# Altium PCB Sensor.PcbDoc
Units mm, origin at the board's own origin, x right, y up, seen from the top; angles counter-clockwise.
Board outline 55 x 30.2 mm, 4 copper layers (Top Layer, Layer 1, Layer 2, Bottom Layer), stack 0.603 mm thick; 56 components, 41 nets, 322 pads, 96 vias.
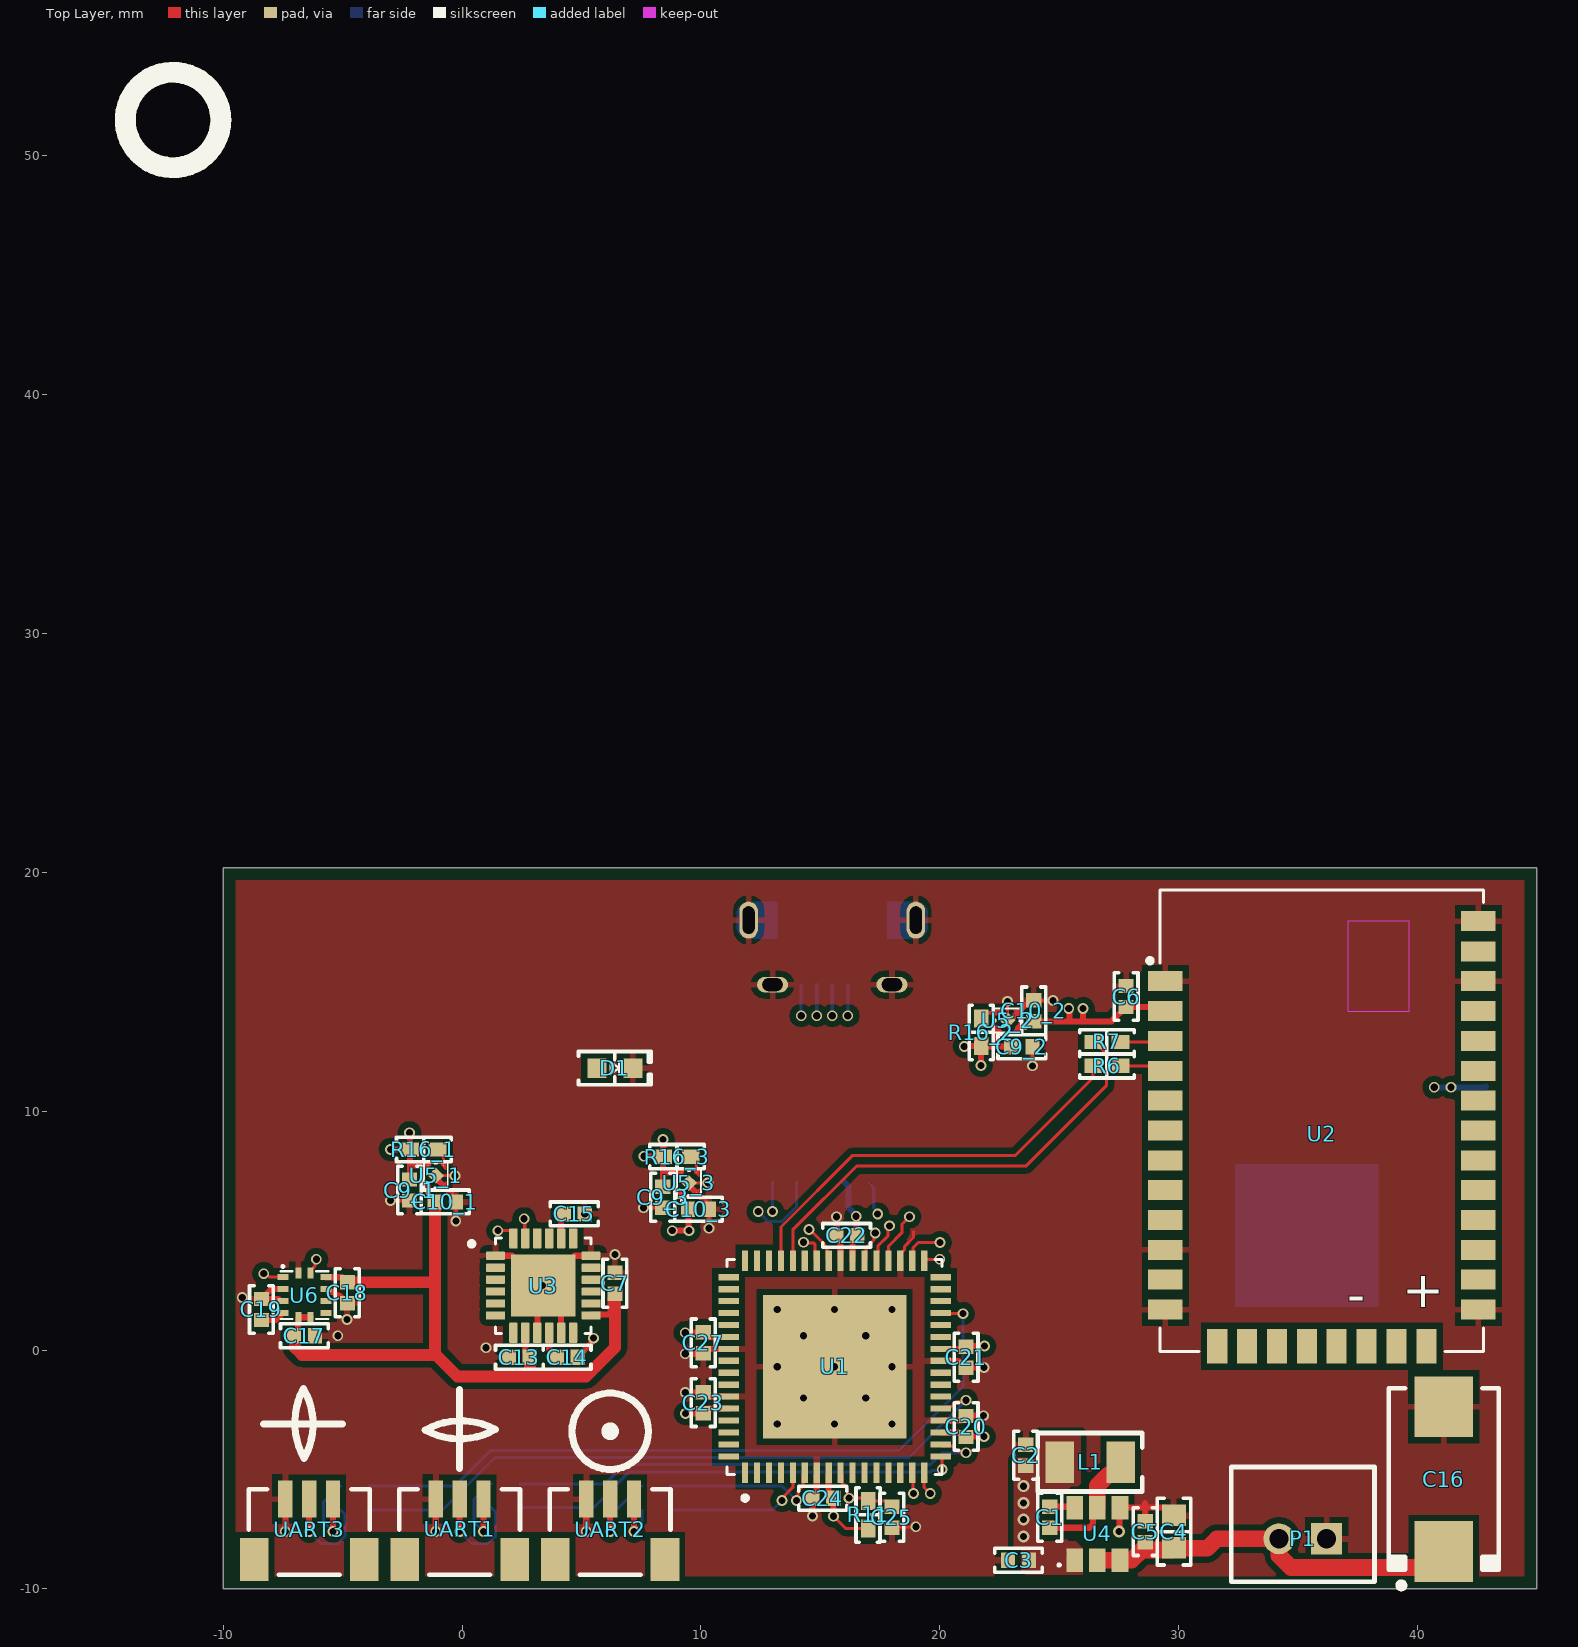
[diagram p0: Top Layer view]
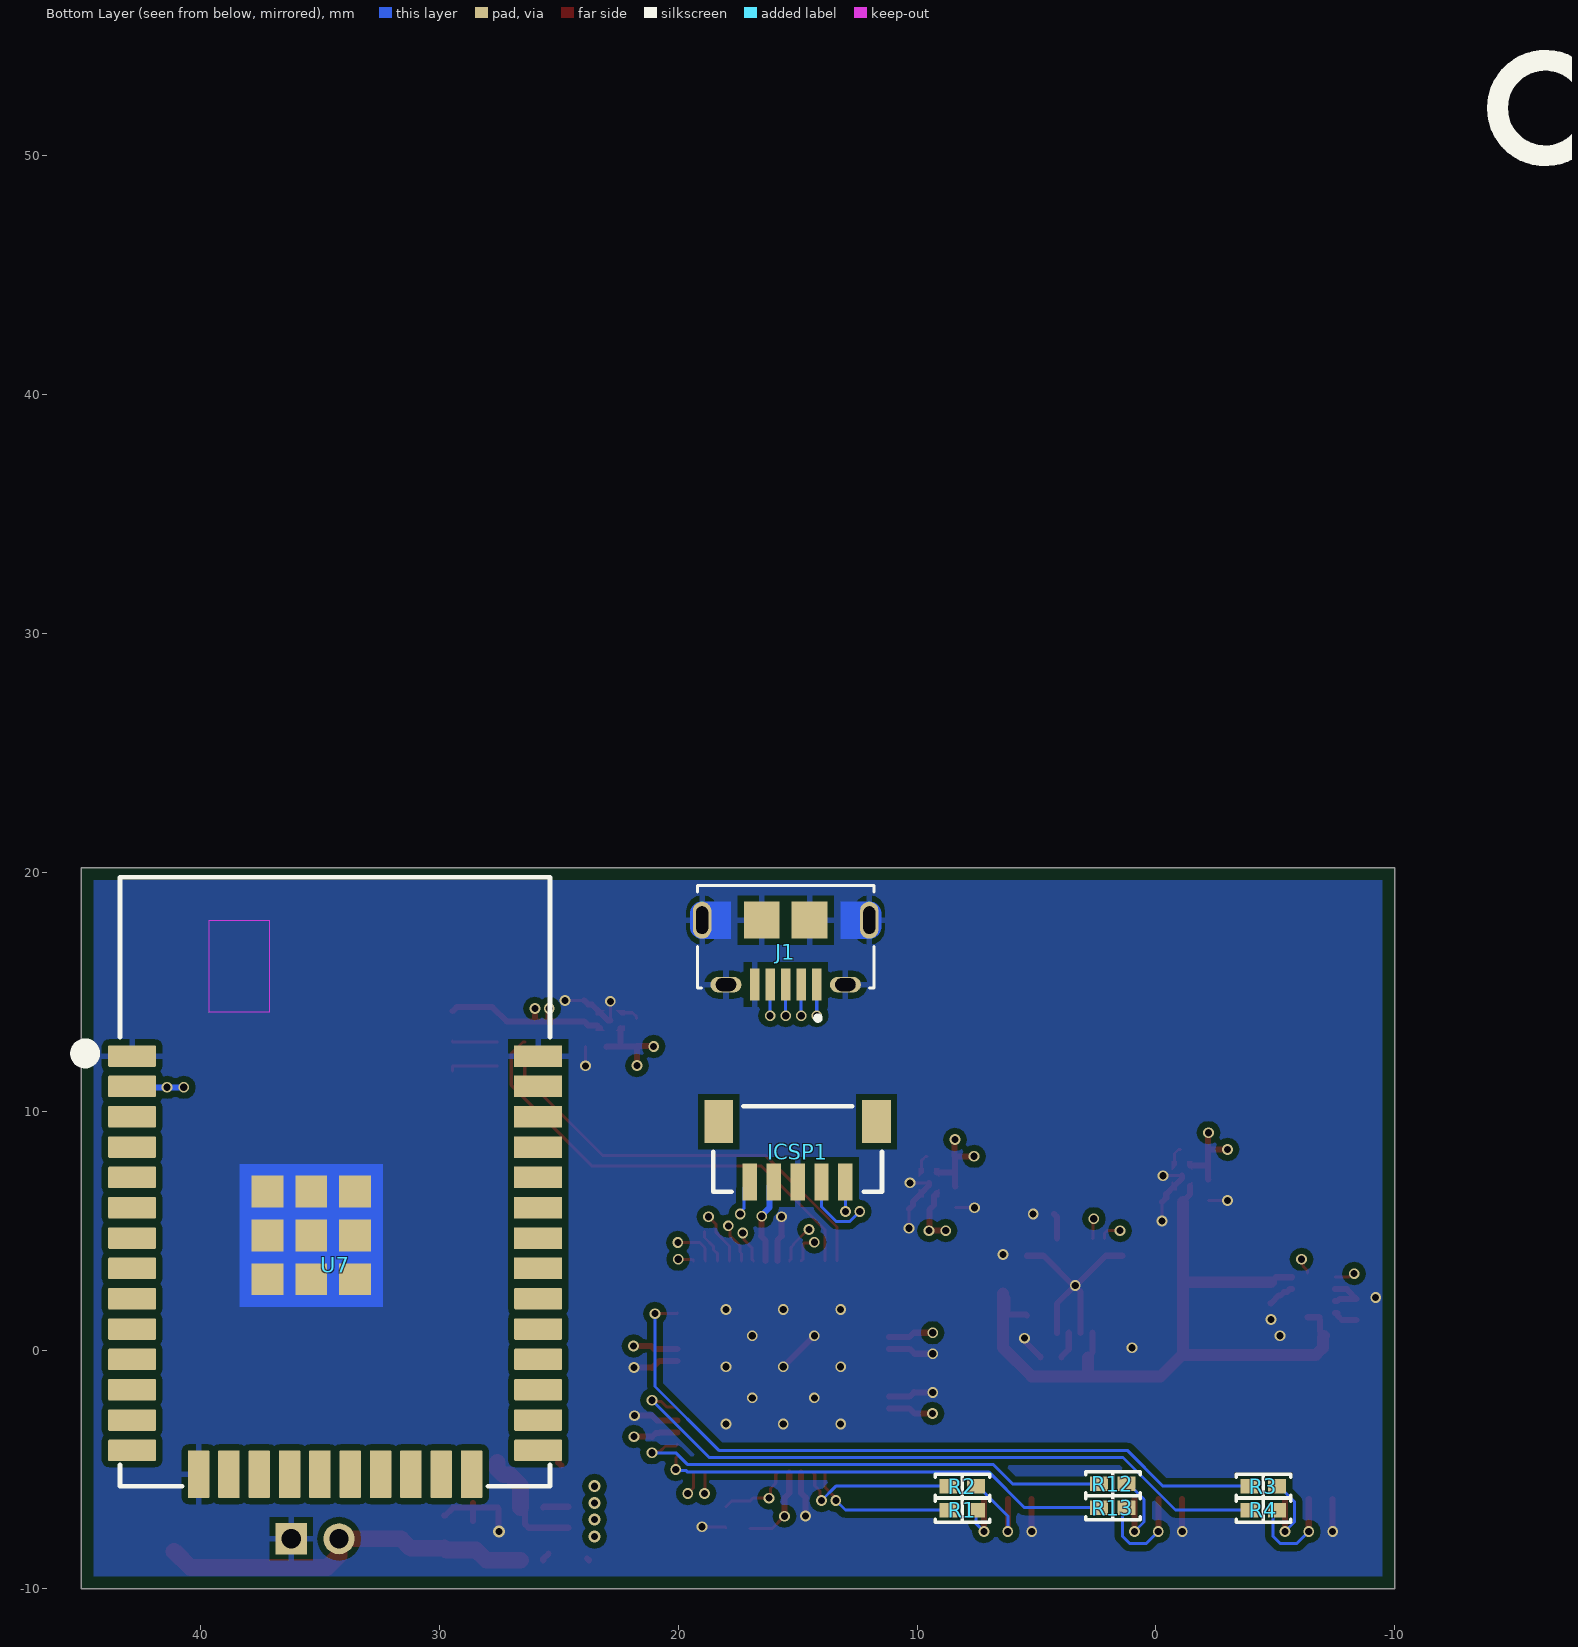
[diagram p1: Bottom Layer view, seen from below]
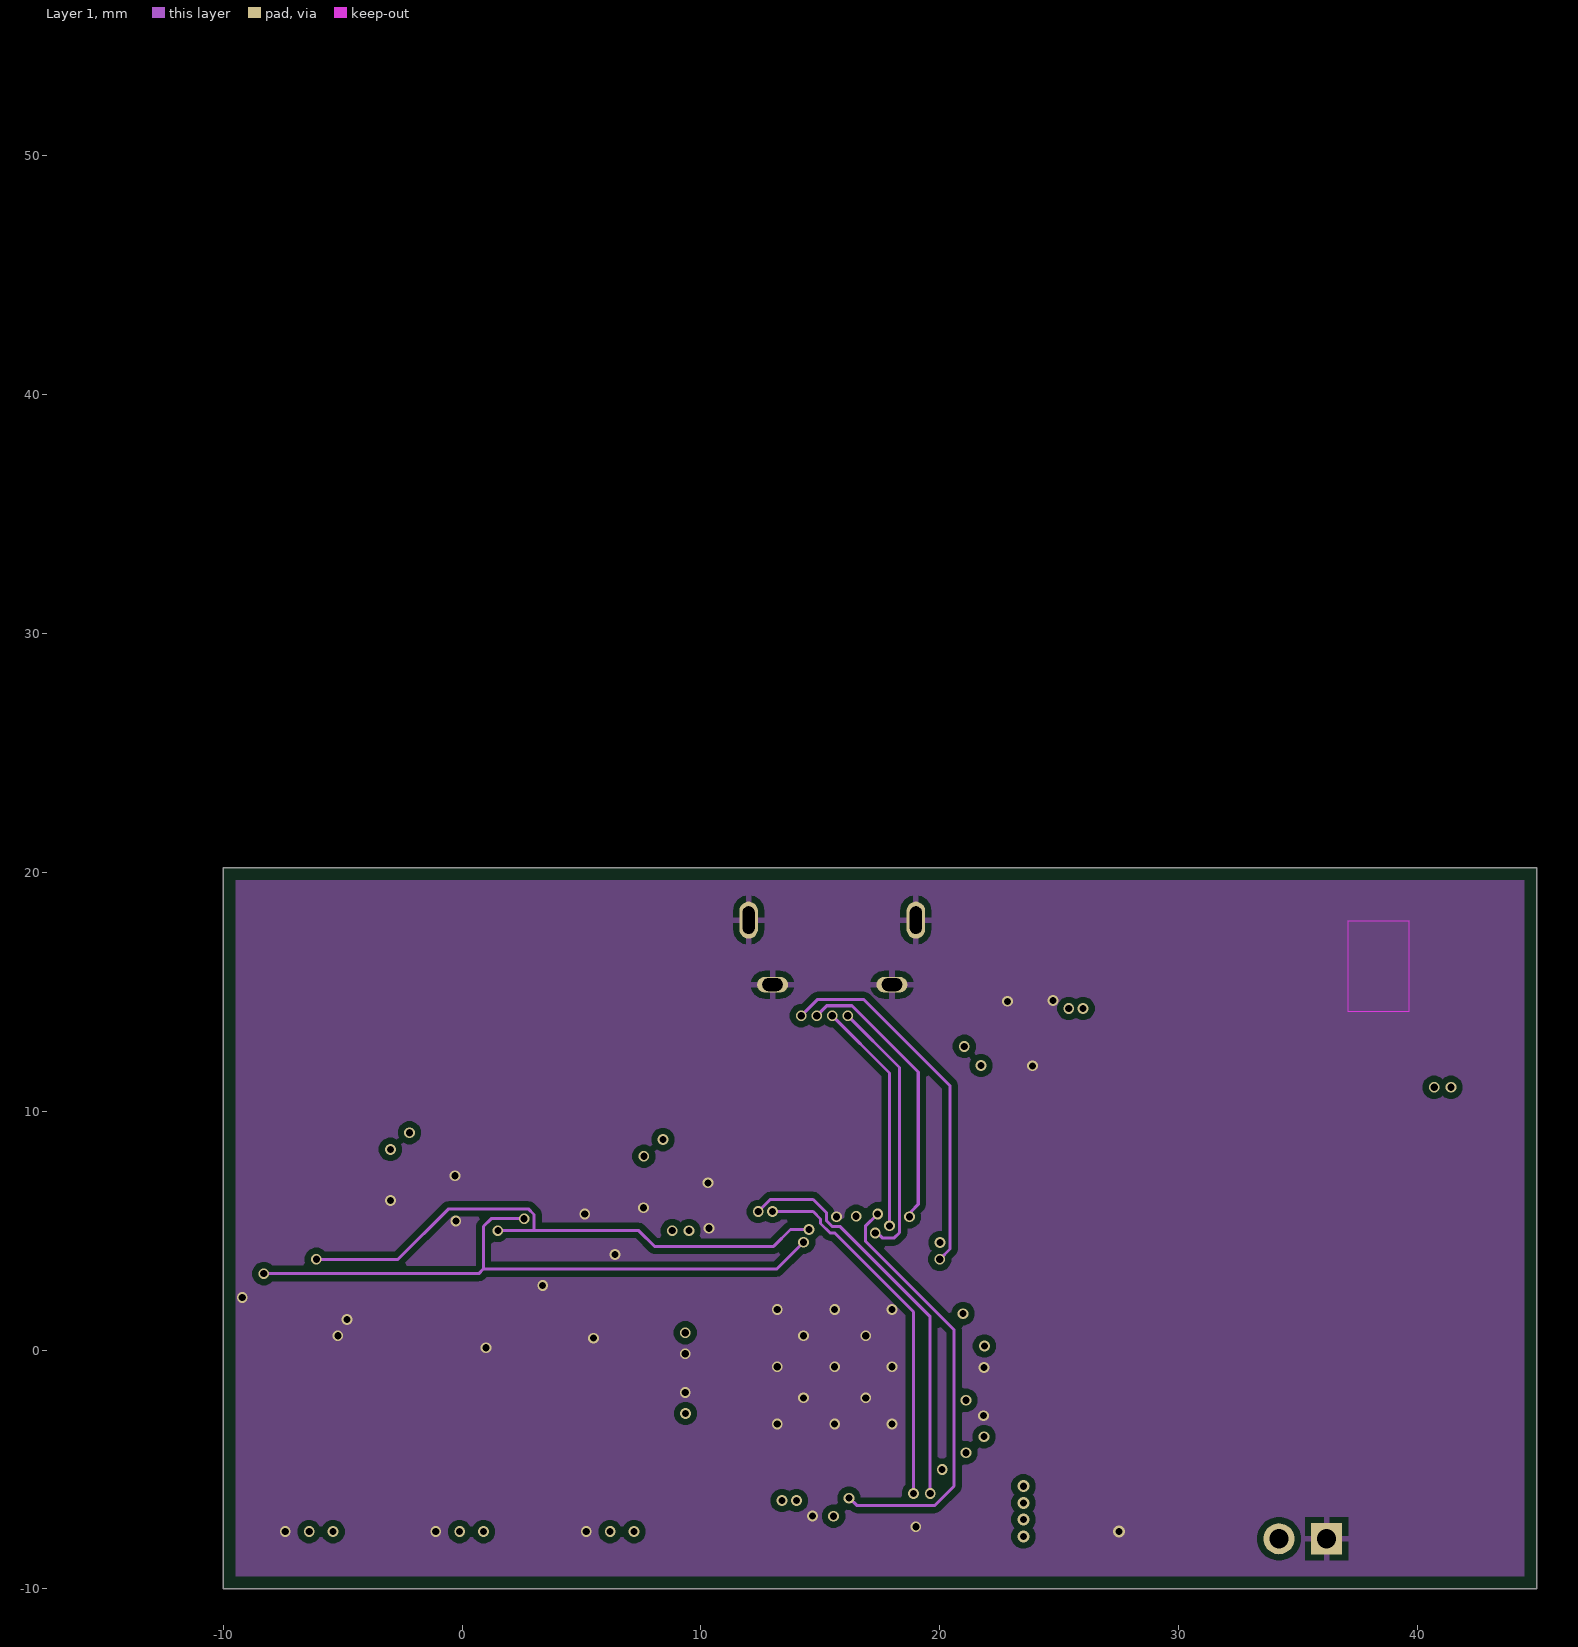
[diagram p2: Layer 1]
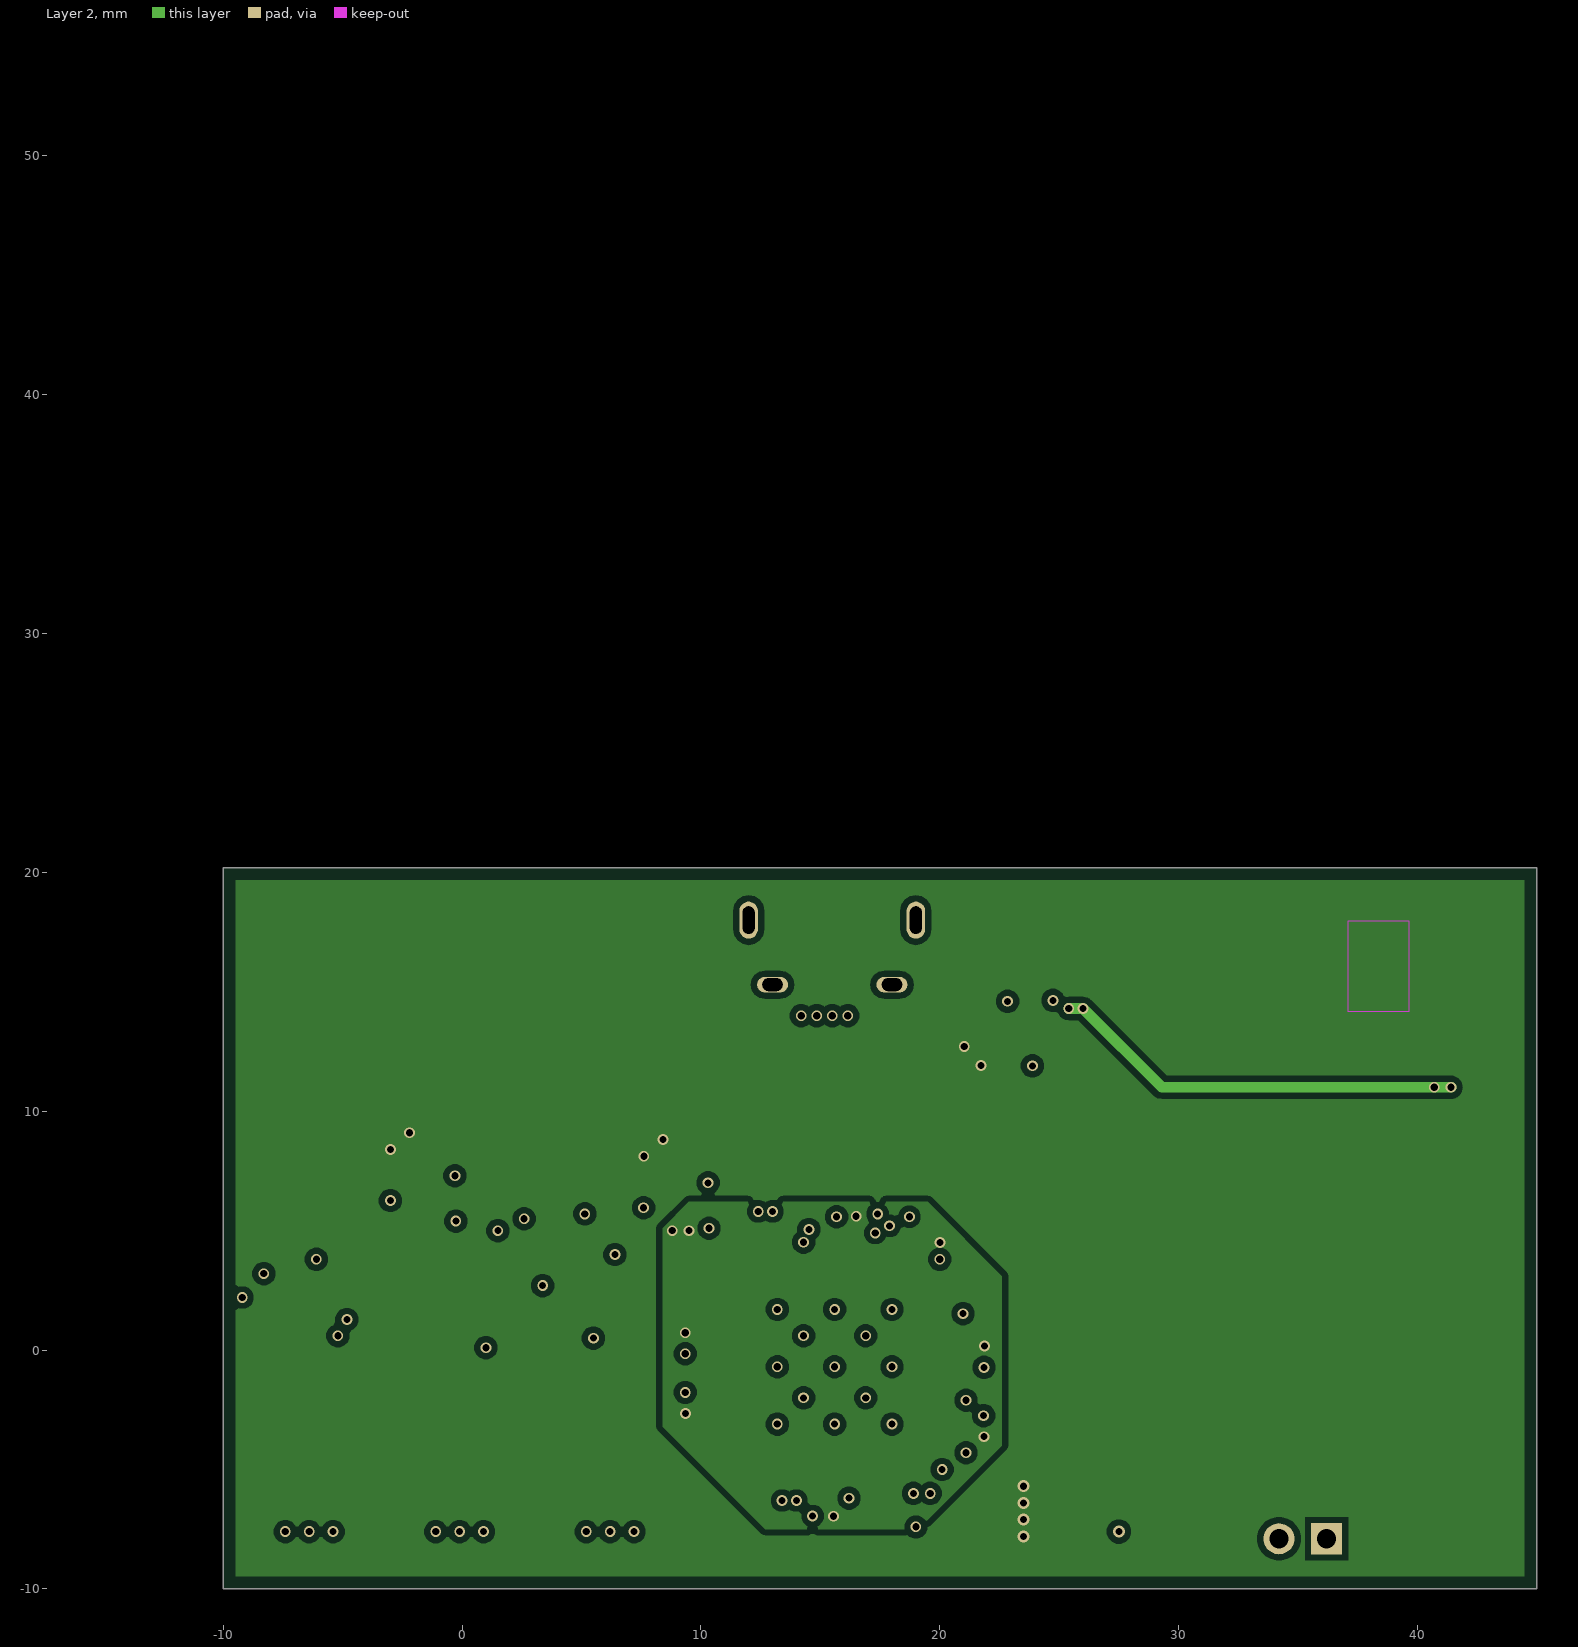
[diagram p3: Layer 2]

## Layer stack, top to bottom
Top Solder: solder mask 0.0102, Solder Resist, Dk 3.5
Top Layer: signal copper 0.0356
Dielectric 2: prepreg 0.0711, PP-006, Dk 4.1
Layer 1: signal copper 0.035
Dielectric 1: dielectric 0.32, FR-4, Dk 4.8
Layer 2: signal copper 0.035
Dielectric 3: prepreg 0.0711, PP-006, Dk 4.1
Bottom Layer: signal copper 0.0356
Bottom Solder: solder mask 0.0102, Solder Resist, Dk 3.5

## Board outline
-10,-10 -10,20.2 45,20.2 45,-10

## Design rules (kind name [scope] priority, off if disabled: settings)
BoardOutlineClearance [All] p1: gap=0.512 ignorepadtopadclearanceinfootprint=FALSE
Clearance "PolyGon Pour Clearance" [InPolygon] p1: gap=0.254 ignorepadtopadclearanceinfootprint=FALSE except(0: Arc-Hole Track-Hole SMDPad-Hole THPad-Hole Via-Hole Fill-Hole Poly-Hole Region-Hole Text-Hole; 0.512: Arc-Text Track-Text SMDPad-Text THPad-Text Via-Text Fill-Text Poly-Text Region-Text Text-Text)
Clearance [All] p2: gap=0.127 ignorepadtopadclearanceinfootprint=TRUE
HoleSize [All] p1: absolutevalues=TRUE maxlimit=10 minlimit=0.025 maxpercent=80.000 minpercent=20.000
PolygonConnect PolygonRelief [IsPolygon and not (IsNamedPolygon('PolygonDirect'))] p1: thpad.connectstyle=Relief thpad.reliefconductorwidth=0.254 thpad.reliefentries=4 thpad.polygonreliefangle="90 Angle" thpad.airgapwidth=0.254 smdpad.connectstyle=Relief smdpad.reliefconductorwidth=0.254 smdpad.reliefentries=4 smdpad.polygonreliefangle="90 Angle" smdpad.airgapwidth=0.254 via.connectstyle=Direct via.reliefconductorwidth=0.254 via.reliefentries=4 via.polygonreliefangle="90 Angle" via.airgapwidth=0.254
PolygonConnect PolygonDirect [All] p2: connectstyle=Direct reliefconductorwidth=0.254 reliefentries=4 polygonreliefangle="90 Angle" airgapwidth=0.254
RoutingVias [All] p1: holewidth=0.3 width=0.5 viastyle="Through Hole" minholewidth=0.3 minwidth=0.45 maxholewidth=0.7 maxwidth=1.27
SolderMaskExpansion [All] p1: expansion=0.102 istentingtop=FALSE
SupplyNets "Schematic Supply Nets_5" [InNet('3V3_IMU')] p1: voltage=0.000
SupplyNets "Schematic Supply Nets_4" [InNet('3V3')] p2: voltage=0.000
SupplyNets "Schematic Supply Nets_3" [InNet('GND')] p3: voltage=0.000
SupplyNets "Schematic Supply Nets_2" [InNet('3V3_XBee')] p4: voltage=0.000
SupplyNets "Schematic Supply Nets_1" [InNet('5V')] p5: voltage=0.000
SupplyNets "Schematic Supply Nets" [InNet('VBAT')] p6: voltage=0.000
Width [All] p1: maxlimit=0.712 minlimit=0.127 preferedwidth=0.254
29 further rules are at their usual default settings.

## Classes and differential pairs
channel class 3V3_LDO: U_3V3_LDO2

## Components (designator, comment, footprint, x,y, rotation, side; value= is the part's Value field where it differs from the comment)
C1 "1 µF" "CAP 0402_1005" 24.6,-7 r270 top
C2 "1 µF" "CAP 0402_1005" 23.6,-4.4 r270 top
C3 "22 µF" "CAP 0402_1005" 23.3,-8.8 r0 top
C4 "22 µF" "CAP 0603_1608" 29.8,-7.6 r270 top
C5 "0.1 µF" "CAP 0402_1005" 28.6,-7.6 r270 top
C6 "1 µF" "CAP 0402_1005" 27.8,14.8 r90 top
C7 "0.1 µF" "CAP 0402_1005" 6.4,2.8 r90 top
C9_1 "0.1 µF" "CAP 0402_1005" -2.2,6.7 r90 top (schematic designator C9)
C9_2 "0.1 µF" "CAP 0402_1005" 23.44,12.7 r180 top (schematic designator C9)
C9_3 "0.1 µF" "CAP 0402_1005" 8.4,6.4 r90 top (schematic designator C9)
C10_1 "0.1 µF" "CAP 0402_1005" -0.7,6.2 r180 top (schematic designator C10)
C10_2 "0.1 µF" "CAP 0402_1005" 23.94,14.2 r270 top (schematic designator C10)
C10_3 "0.1 µF" "CAP 0402_1005" 9.9,5.9 r180 top (schematic designator C10)
C13 "0.01 µF" "CAP 0402_1005" 2.4,-0.3 r180 top
C14 "0.1 µF" "CAP 0402_1005" 4.4,-0.3 r0 top
C15 "2200 pF" "CAP 0402_1005" 4.7,5.7 r0 top
C16 "100µF" "CAP POL 2917_7343" 41.1,-5.4 r90 top
C17 "1 µF" "CAP 0402_1005" -6.6,0.6 r0 top
C18 "0.1 µF" "CAP 0402_1005" -4.8,2.4 r270 top
C19 "0.1 µF" "CAP 0402_1005" -8.4,1.7 r90 top
C20 "0.1 µF" "CAP 0402_1005" 21.1,-3.2 r270 top
C21 "0.1 µF" "CAP 0402_1005" 21.1,-0.3 r90 top
C22 "0.1 µF" "CAP 0402_1005" 16.1,4.8 r0 top
C23 "0.1 µF" "CAP 0402_1005" 10.1,-2.2 r270 top
C24 "0.1 µF" "CAP 0402_1005" 15.1,-6.2 r0 top
C25 "0.1 µF" "CAP 0402_1005" 18,-7 r270 top
C27 "0.1 µF" "CAP 0402_1005" 10.1,0.3 r90 top
D1 "Green" "LED 0603_1608 GREEN" 6.4,11.8 r0 top
ICSP1 "BM05B-SRSS-TB(LF)(SN)" "JST BM05B-SRSS-TB" 15,8.3 r180 bottom
J1 "Mirco USB port" AMPHENOL_10118194-0001LF 15.5,18 r0 bottom
L1 "4.7µH" "IND 1008_2520" 26.3,-4.7 r180 top
P1 "2 pin 2mm JST Male" "2pin - 2mm JST male" 35.2,-7.9 r180 top
R1 "22 Ohms" "RES 0402_1005" 8.1,-6.7 r180 bottom
R2 "22 Ohms" "RES 0402_1005" 8.1,-5.7 r180 bottom
R3 "22 Ohms" "RES 0402_1005" -4.5,-5.7 r180 bottom
R4 "22 Ohms" "RES 0402_1005" -4.5,-6.7 r180 bottom
R6 "22 Ohms" "RES 0402_1005" 27,11.9 r0 top
R7 "22 Ohms" "RES 0402_1005" 27,12.9 r0 top
R11 "10k" "RES 0402_1005" 17,-6.9 r90 top
R12 "22 Ohms" "RES 0402_1005" 1.8,-5.6 r180 bottom
R13 "22 Ohms" "RES 0402_1005" 1.8,-6.6 r180 bottom
R16_1 "10k" "RES 0402_1005" -1.6,8.4 r0 top (schematic designator R16)
R16_2 "10k" "RES 0402_1005" 21.74,13.3 r90 top (schematic designator R16)
R16_3 "10k" "RES 0402_1005" 9,8.1 r0 top (schematic designator R16)
U1 "PIC32MZ0512EFE064" QFN50P900X900X100-65N 15.6,-0.7 r90 top
U2 "XB3-24Z8UM-J" XCVR_XB3-24Z8UM-J 36,9.6 r0 top
U3 "MPU6050" IC_MPU6050 3.4,2.7 r0 top
U4 "AP63205WU-7" "TSOT-26-6 - 3.2mm" 26.6,-7.7 r180 top
U5_1 "3.3V LDO" XDFN-4 -1.1,7.3 r90 top (schematic designator U5)
U5_2 "3.3V LDO" XDFN-4 22.84,13.8 r180 top (schematic designator U5)
U5_3 "3.3V LDO" XDFN-4 9.5,7 r90 top (schematic designator U5)
U6 "LIS3MDL" LGA12_ST -6.6,2.3 r0 top
U7 "ESP32" "Espressif ESP32-WROOM-32" 34.365,4.8 r180 bottom
UART1 "BM03B-SRSS-TB(LF)(SN)" "JST BM03B-SRSS-TB" -0.1,-7.5 r180 top
UART2 "BM03B-SRSS-TB(LF)(SN)" "JST BM03B-SRSS-TB" 6.2,-7.5 r180 top
UART3 "BM03B-SRSS-TB(LF)(SN)" "JST BM03B-SRSS-TB" -6.4,-7.5 r180 top

## Footprints (in the part's own frame and the unit in brackets; to place one, negate y for a bottom-side part, rotate by r counter-clockwise, add the part's x,y. Pads: shape width x height; smd on the part's side, far side on the other; paste and mask are expansions set on the pad)
"2pin - 2mm JST male" [mm]
  rect 1.3x1.3 hole 0.8: 1(-1,0)
  round 1.3 hole 0.8: 2(1,0)
  silkscreen extent -3,-3 3,1.8, body extent -2.93,-2.97 2.93,1.7, height 5.89
AMPHENOL_10118194-0001LF [mm]
  rect 0.4x1.35 smd: 1(-1.3,2.7) 2(-0.65,2.7) 3(0,2.7) 4(0.65,2.7) 5(1.3,2.7)
  oval 1.3x0.65 hole 0.55 slot 0.85 at 0 deg: S1(-2.5,2.7) S2(2.5,2.7)
  oval 0.775x1.55 hole 0.5 slot 1.15 at 90 deg: S3(-3.5,0) S6(3.5,0)
  rect 1.5x1.55 smd: S4(-1,0) S5(1,0)
  Top Layer region: 193 vertices and 0 holes, not listed, extent -4,-0.775 -2.3,0.78
  Top Layer region: 193 vertices and 0 holes, not listed, extent 2.3,-0.78 4,0.775
  silkscreen extent -3.7,-1.45 3.7,4.2, body extent -4.02,-2.7 4.03,3.1, height 2.7
"CAP 0402_1005" [mm] "Chip Capacitor, 2-Leads, Body 1.02x0.51mm, IPC Medium Density"
  rect 0.6x0.64 smd: 1(-0.44,0) 2(0.44,0)
  silkscreen extent -1,-0.5 1,0.5, body extent -0.5,-0.26 0.5,0.26, height 0.52
"CAP 0603_1608" [mm] "Chip Capacitor, 2-Leads, Body 1.60x0.80mm, IPC Medium Density"
  rect 0.9x1 smd: 1(-0.675,0) 2(0.675,0)
  silkscreen extent -1.4,-0.7 1.4,0.7, body extent -0.8,-0.41 0.8,0.41, height 0.82
"CAP POL 2917_7343" [mm] "Molded Capacitor, 2-Leads, Body 7.30x4.30mm, IPC Medium Density"
  rect 2.55x2.45 smd: 1(-3.025,0) 2(3.025,0)
  silkscreen extent -4.57,-2.3 3.8,2.3, body extent -3.65,-2.15 3.65,2.15, height 4.1
"Espressif ESP32-WROOM-32" [mm] "39-SMD Module"
  rrect10% 2x0.9 smd paste+0 mask+0.05: 1(-8.5,7.51) 2(-8.5,6.24) 3(-8.5,4.97) 4(-8.5,3.7) 5(-8.5,2.43) 6(-8.5,1.16) 7(-8.5,-0.11) 8(-8.5,-1.38) 9(-8.5,-2.65) 10(-8.5,-3.92) 11(-8.5,-5.19) 12(-8.5,-6.46) 13(-8.5,-7.73) 14(-8.5,-9) 25(8.5,-9) 26(8.5,-7.73) 27(8.5,-6.46) 28(8.5,-5.19) 29(8.5,-3.92) 30(8.5,-2.65)
  rrect10% 0.9x2 smd paste+0 mask+0.05: 15(-5.715,-10) 16(-4.445,-10) 17(-3.175,-10) 18(-1.905,-10) 19(-0.635,-10) 20(0.635,-10) 21(1.905,-10) 22(3.175,-10) 23(4.445,-10) 24(5.715,-10)
  rect 2x0.9 smd paste+0 mask+0.05: 31(8.5,-1.38) 32(8.5,-0.11) 33(8.5,1.16) 34(8.5,2.43) 35(8.5,3.7) 36(8.5,4.97) 37(8.5,6.24) 38(8.5,7.51)
  rect 1.33x1.33 smd paste+0 mask+0.05: 39(-2.835,-1.835) 39(-2.835,0) 39(-2.835,1.835) 39(-1,0) 39(-1,-1.835) 39(-1,1.835) 39(0.835,-1.835) 39(0.835,0) 39(0.835,1.835)
  Top Layer region: -4.001,3 1.999,3 1.999,-3 -4.001,-3
  silkscreen extent -10.71,-10.5 9,15, body extent -9,-10.5 9,15, height 3.2
IC_MPU6050 [mm]
  rrect25% 0.8x0.35 smd: 1(-2,1.25) 2(-2,0.75) 3(-2,0.25) 4(-2,-0.25) 5(-2,-0.75) 6(-2,-1.25) 13(2,-1.25) 14(2,-0.75) 15(2,-0.25) 16(2,0.25) 17(2,0.75) 18(2,1.25)
  rrect25% 0.35x0.85 smd: 7(-1.25,-1.975) 8(-0.75,-1.975) 9(-0.25,-1.975) 10(0.25,-1.975) 11(0.75,-1.975) 12(1.25,-1.975) 19(1.25,1.975) 20(0.75,1.975) 21(0.25,1.975) 22(-0.25,1.975) 23(-0.75,1.975) 24(-1.25,1.975)
  rect 2.7x2.6 smd paste-2: 25(0,0)
  silkscreen extent -3.1,-2 2,2, body extent -2,-2 2,2, height 0.93
"IND 1008_2520" [mm] "Chip Inductance, 2-leads, Body 2.5x2.1mm, IPC Medium Density"
  rect 1.2x1.75 smd: 1(-1.275,0) 2(1.275,0)
  silkscreen extent -2.18,-1.22 2.2,1.22, body extent -1.3,-1.05 1.3,1.05, height 1
"JST BM03B-SRSS-TB" [mm] "1.0mm pitch/Disconnectable Crimp style connector"
  rect 0.6x1.55 smd: 1(-1,-1.262) 2(0,-1.262) 3(1,-1.262)
  rect 1.2x1.8 smd: M(-2.3,1.262) M(2.3,1.262)
  silkscreen extent -2.53,-1.68 2.53,1.91, body extent -2.5,-1.69 2.5,1.91, height 4.32
"JST BM05B-SRSS-TB" [mm] "1.0mm pitch/Disconnectable Crimp style connector"
  rect 0.6x1.55 smd: 1(-2,-1.262) 2(-1,-1.262) 3(0,-1.262) 4(1,-1.262) 5(2,-1.262)
  rect 1.2x1.8 smd: M(-3.3,1.262) M(3.3,1.262)
  silkscreen extent -3.53,-1.68 3.53,1.91, body extent -3.5,-1.69 3.5,1.91, height 4.32
"LED 0603_1608 GREEN" [mm] "Chip Diode, 2-Leads, Body 1.60x0.80mm, IPC Medium Density"
  rect 0.8x0.8 smd: 1(-0.75,0) 2(0.75,0)
  silkscreen extent -1.52,-0.7 1.52,0.7, body extent -0.8,-0.4 0.8,0.4, height 0.53
LGA12_ST [mm]
  rect 0.45x0.25 smd: 1(-0.9,0.75) 2(-0.9,0.25) 3(-0.9,-0.25) 4(-0.9,-0.75) 7(0.9,-0.75) 8(0.9,-0.25) 9(0.9,0.25) 10(0.9,0.75)
  rect 0.25x0.45 smd: 5(-0.25,-0.925) 6(0.25,-0.925) 11(0.25,0.925) 12(-0.25,0.925)
  silkscreen extent -1,-1 1,1.25, body extent -1,-1 1,1, height 0.25
QFN50P900X900X100-65N [mm]
  rect 0.86x0.26 smd: 1(-4.435,3.75) 2(-4.435,3.25) 3(-4.435,2.75) 4(-4.435,2.25) 5(-4.435,1.75) 6(-4.435,1.25) 7(-4.435,0.75) 8(-4.435,0.25) 9(-4.435,-0.25) 10(-4.435,-0.75) 11(-4.435,-1.25) 12(-4.435,-1.75) 13(-4.435,-2.25) 14(-4.435,-2.75) 15(-4.435,-3.25) 16(-4.435,-3.75) 33(4.435,-3.75) 34(4.435,-3.25) 35(4.435,-2.75) 36(4.435,-2.25) 37(4.435,-1.75) 38(4.435,-1.25) 39(4.435,-0.75) 40(4.435,-0.25) 41(4.435,0.25) 42(4.435,0.75) 43(4.435,1.25) 44(4.435,1.75) 45(4.435,2.25) 46(4.435,2.75) 47(4.435,3.25) 48(4.435,3.75)
  rect 0.26x0.86 smd: 17(-3.75,-4.435) 18(-3.25,-4.435) 19(-2.75,-4.435) 20(-2.25,-4.435) 21(-1.75,-4.435) 22(-1.25,-4.435) 23(-0.75,-4.435) 24(-0.25,-4.435) 25(0.25,-4.435) 26(0.75,-4.435) 27(1.25,-4.435) 28(1.75,-4.435) 29(2.25,-4.435) 30(2.75,-4.435) 31(3.25,-4.435) 32(3.75,-4.435) 49(3.75,4.435) 50(3.25,4.435) 51(2.75,4.435) 52(2.25,4.435) 53(1.75,4.435) 54(1.25,4.435) 55(0.75,4.435) 56(0.25,4.435) 57(-0.25,4.435) 58(-0.75,4.435) 59(-1.25,4.435) 60(-1.75,4.435) 61(-2.25,4.435) 62(-2.75,4.435) 63(-3.25,4.435) 64(-3.75,4.435)
  rect 6x6 smd: 65(0,0)
  silkscreen extent -5.59,-4.5 4.5,4.5, body extent -4.52,-4.52 4.52,4.52, height 0.9
"RES 0402_1005" [mm] "Chip Resistor, 2-Leads, Body 1.0x0.5mm, IPC Medium Density"
  rect 0.75x0.6 smd: 1(-0.575,0) 2(0.575,0)
  silkscreen extent -1.14,-0.51 1.14,0.51, body extent -0.5,-0.25 0.5,0.25, height 0.35
"TSOT-26-6 - 3.2mm" [mm]
  rect 0.7x1 smd: 1(0.95,1.1) 2(0,1.1) 3(-0.95,1.1) 4(-0.95,-1.1) 5(0,-1.1) 6(0.95,-1.1)
  silkscreen extent 1.54,1.25 1.65,1.35, body extent -1.45,-1.2 1.45,1.2, height 1
XCVR_XB3-24Z8UM-J [mil]
  rect 57x33 smd: 1(-258,230) 2(-258,180.8) 3(-258,131.6) 4(-258,82.4) 5(-258,33.2) 6(-258,-16) 7(-258,-65.2) 8(-258,-114.4) 9(-258,-163.6) 10(-258,-212.8) 11(-258,-262) 12(-258,-311.2) 21(258,-311.2) 22(258,-262) 23(258,-212.8) 24(258,-163.6) 25(258,-114.4) 26(258,-65.2) 27(258,-16) 28(258,33.2) 29(258,82.4) 30(258,131.6) 31(258,180.8) 32(258,230) 33(258,279.2) 34(258,329)
  rect 33x57 smd: 13(-172.5,-371.5) 14(-123.3,-371.5) 15(-74.1,-371.5) 16(-24.9,-371.5) 17(24.3,-371.5) 18(73.5,-371.5) 19(122.7,-371.5) 20(172.5,-371.5)
  Keep-Out Layer region: 143.5,180 43.5,180 43.5,330 143.5,330
  silkscreen extent -287,-380 266,380, body extent -267,-380 267,380, height 97
XDFN-4 [mil]
  round 1 smd mask+2.56: 1(-16.93,12.79) 2(-16.93,-12.79) 3(16.93,-12.79) 4(16.93,12.79)
  rect 18.9x18.9 smd rot 135 mask+2.56: 5(0,0)
  Top Layer region: 16.93,-8.65 9.84,-15.75 9.84,-16.93 24.02,-16.93 24.02,-8.65
  Top Layer region: 16.93,8.65 9.84,15.75 9.84,16.93 24.02,16.93 24.02,8.65
  Top Layer region: -16.93,-8.65 -9.84,-15.75 -9.84,-16.93 -24.02,-16.93 -24.02,-8.65
  Top Layer region: -16.93,8.65 -9.84,15.75 -9.84,16.93 -24.02,16.93 -24.02,8.65
  silkscreen extent -31,-20 20,20, body extent -20,-20 20,20, height 16

## Part data
C1 C2 C3 C6 C13 C15 C17: library part C0402C104K4RACAUTO, "CAP CER 0.1UF 16V X7R 0402", Capacitance="0.1 µF", Device Package="0402 (1005 Metric)", Manufacturer=KEMET, Operating Temperature="-55°C ~ 125°C", Ratings=AEC-Q200, Supplier Part Number 1=399-6828-1-ND, Temperature Coefficient=X7R, Tolerance=±10%, Voltage - Rated=16V, Applications="Automotive, Bypass, Decoupling", ComponentLink1Description=Datasheet, ComponentLink1URL=https://api.kemet.com/component-edge/download/specsheet/C0402C104K4RACAUTO.pdf, ComponentLink2Description="DigiKey Link", ComponentLink2URL=https://www.digikey.com/en/products/detail/kemet/C0402C104K4RACAUTO/3314827, LastUpdated="8/14/2022 9:05:51 PM", Lifecycle Status=Active, Minimum Order=1, Mounting Type="Surface Mount, MLCC", Package / Case="0402 (1005 Metric)", Packaging=TapeAndReel, Part Number=C0402C104K4RACAUTO, Part Status=Active, PartId=3024, Price=0.01, Series="SMD Auto X7R", Size / Dimension="0.039\" L x 0.020\" W (1.00mm x 0.50mm)", Supplier 1=DigiKey, Thickness (Max)="0.022\" (0.55mm)"
C4: library part C0603B476M007T, "CAP CER 47UF 6.3V X5R 0603", Capacitance="47 µF", Device Package="0603 (1608 Metric)", Manufacturer="Holy Stone Enterprise Co., Ltd.", Operating Temperature="-55°C ~ 85°C", Supplier Part Number 1=4587-C0603B476M007TCT-ND, Temperature Coefficient=X5R, Tolerance=±20%, Voltage - Rated=6.3V, Applications="SMPS Filtering", ComponentLink1Description=Datasheet, ComponentLink1URL=https://media.digikey.com/pdf/Data%20Sheets/Holy%20Stone/HCC_Series_DS.pdf, ComponentLink2Description="DigiKey Link", ComponentLink2URL=https://www.digikey.com/en/products/detail/holy-stone-enterprise-co-ltd/C0603B476M007T/16895203, LastUpdated="2/9/2024 8:09:41 PM", Lifecycle Status=Active, Minimum Order=1, Mounting Type="Surface Mount, MLCC", Package / Case="0603 (1608 Metric)", Packaging=TapeAndReel, Part Number=C0603B476M007T, Part Status=Active, PartId=48531, Price=0.12, Series=HCC, Size / Dimension="0.063\" L x 0.031\" W (1.60mm x 0.80mm)", Supplier 1=DigiKey, Thickness (Max)="0.039\" (1.00mm)"
C5 C7 C9_1 C9_2 C9_3 C10_1 C10_2 C10_3 C14 C18 C19 C20 C21 C22 C23 C24 C25 C27: library part C0402C104K4RACAUTO, "CAP CER 0.1UF 16V X7R 0402", Device Package="0402 (1005 Metric)", Manufacturer=KEMET, Operating Temperature="-55°C ~ 125°C", Ratings=AEC-Q200, Supplier Part Number 1=399-6828-1-ND, Temperature Coefficient=X7R, Tolerance=±10%, Voltage - Rated=16V, Applications="Automotive, Bypass, Decoupling", Capacitance="0.1 µF", ComponentLink1Description=Datasheet, ComponentLink1URL=https://api.kemet.com/component-edge/download/specsheet/C0402C104K4RACAUTO.pdf, ComponentLink2Description="DigiKey Link", ComponentLink2URL=https://www.digikey.com/en/products/detail/kemet/C0402C104K4RACAUTO/3314827, LastUpdated="8/14/2022 9:05:51 PM", Lifecycle Status=Active, Minimum Order=1, Mounting Type="Surface Mount, MLCC", Package / Case="0402 (1005 Metric)", Packaging=TapeAndReel, Part Number=C0402C104K4RACAUTO, Part Status=Active, PartId=3024, Price=0.01, Series="SMD Auto X7R", Size / Dimension="0.039\" L x 0.020\" W (1.00mm x 0.50mm)", Supplier 1=DigiKey, Thickness (Max)="0.022\" (0.55mm)"
C16: library part 293D107X0020E2TE3, "CAP TANT 100UF 20% 20V 2917", Device Package="2917 (7343 Metric)", ESR (Equivalent Series Resistance)=500mOhm, Manufacturer="Vishay Sprague", Manufacturer Size Code=E, Operating Temperature="-55°C ~ 125°C", Supplier Part Number 1=718-293D107X0020E2TE3CT-ND, Tolerance=±20%, Capacitance=100µF, ComponentLink1Description=Datasheet, ComponentLink1URL=http://www.vishay.com/docs/40002/293d.pdf, ComponentLink2Description="DigiKey Link", ComponentLink2URL=http://digikey.com/product-detail/en/vishay-sprague/293D107X0020E2TE3/718-293D107X0020E2TE3CT-ND/10507022, Features="General Purpose", Height - Seated (Max)="0.170\" (4.32mm)", LastUpdated="13-Aug-20 10:43:35 AM", Lifecycle Status=Active, Minimum Order=1, Mounting Type="Surface Mount", Package / Case="2917 (7343 Metric)", Packaging=TapeAndReel, Part Number=293D107X0020E2TE3, Part Status=Active, PartId=1360, Price=0.70, Series="TANTAMOUNT®, 293D", Size / Dimension="0.287\" L x 0.169\" W (7.30mm x 4.30mm)", Supplier 1=DigiKey, Type=Molded
D1: library part XZCDGK53W-8VF, "1.6X0.8MM LC GREEN PIXSOLED DOME", Current - Test=2mA, Device Package="0603 (1608 Metric)", Lens Color=Colorless, Manufacturer=SunLED, Millicandela Rating=417mcd, Supplier Device Package=2-SMD, Supplier Part Number 1=1497-XZCDGK53W-8VFCT-ND, Voltage - Forward (Vf) (Typ)=2.65V, Color=Green, ComponentLink1Description=Datasheet, ComponentLink1URL=https://www.sunledusa.com/products/spec/XZCDGK53W-8VF.pdf, ComponentLink2Description="DigiKey Link", ComponentLink2URL=http://digikey.com/product-detail/en/sunled/XZCDGK53W-8VF/1497-XZCDGK53W-8VFCT-ND/10449792, Configuration=Independent, Height (Max)=1.10mm, LastUpdated="21-Jan-20 3:12:09 AM", Lens Size="0.35mm Dia", Lens Style="Round with Domed Top", Lens Transparency=Clear, Lifecycle Status=Active, Minimum Order=1, Mounting Type="Surface Mount", Package / Case="0603 (1608 Metric)", Packaging=Unknown, Part Number=XZCDGK53W-8VF, Part Status=Active, PartId=938, Price=0.18, Series="Ultra Low Current", Size / Dimension="1.60mm L x 0.80mm W", Supplier 1=DigiKey, Viewing Angle=60°, Wavelength - Dominant=525nm, Wavelength - Peak=515nm
ICSP1: "CONN HEADER SMD 5POS 1MM", Current Rating (Amps)=0.7A, Insulation Color=Natural, Manufacturer="JST Sales America Inc.", Material Flammability Rating="UL94 V-0", Operating Temperature="-25°C ~ 85°C", Supplier Part Number 1=455-1791-1-ND, Voltage Rating=50V, ComponentLink1Description=Datasheet, ComponentLink1URL=http://www.jst-mfg.com/product/pdf/eng/eSR.pdf, ComponentLink2Description="DigiKey Link", ComponentLink2URL=http://digikey.com/product-detail/en/jst-sales-america-inc/BM05B-SRSS-TB-LF-SN/455-1791-1-ND/926862, Connector Type=Header, Contact Finish - Mating=Tin, Contact Finish - Post=Tin, Contact Material="Copper Alloy", Contact Shape=Square, Contact Type="Male Pin", Fastening Type=Push-Pull, Features="Solder Retention", Insulation Height="0.167\" (4.25mm)", Insulation Material="Polyamide (PA), Nylon", LastUpdated="1/12/2020 10:14:00 PM", Lifecycle Status=Active, Minimum Order=1, Mounting Type="Surface Mount", Number of Positions=5, Number of Positions Loaded=All, Number of Rows=1, Packaging=TapeAndReel, Part Number=BM05B-SRSS-TB(LF)(SN), Part Status=Active, PartId=18, Pitch - Mating="0.039\" (1.00mm)", Price=0.35, Series=SR, Shrouding="Shrouded - 4 Wall", Style="Board to Cable/Wire", Supplier 1=DigiKey, Termination=Solder
J1: library part 10118194-0001LF, "USB - micro B USB 2.0 Receptacle Connector 5 Position Surface Mount, Right Angle; Through Hole", Package=None, Availability=Unavailable, MF="Amphenol ICC", MP=10118194-0001LF, Price=None, SnapEDA_Link=https://www.snapeda.com/parts/10118194-0001LF/Amphenol%20FCI/view-part/1413308/?ref=snap
L1: library part MLP2520S4R7ST0S1, "FIXED IND 4.7UH 1A 110 MOHM SMD", Current Rating (Amps)=1A, DC Resistance (DCR)="143mOhm Max", Device Package="1008 (2520 Metric)", Inductance Frequency - Test=2MHz, Manufacturer="TDK Corporation", Operating Temperature="-40°C ~ 125°C", Supplier Part Number 1=445-6378-1-ND, Tolerance=±20%, ComponentLink1Description=Datasheet, ComponentLink1URL=https://product.tdk.com/info/en/catalog/datasheets/inductor_commercial_power_mlp2520_en.pdf?ref_disty=digikey, ComponentLink2Description="DigiKey Link", ComponentLink2URL=http://digikey.com/product-detail/en/tdk-corporation/MLP2520S4R7ST0S1/445-6378-1-ND/2465705, Height - Seated (Max)="0.039\" (1.00mm)", Inductance=4.7µH, LastUpdated="13-Aug-20 11:03:40 AM", Lifecycle Status=Active, Material - Core=Ferrite, Minimum Order=1, Mounting Type="Surface Mount", Package / Case="1008 (2520 Metric)", Packaging=TapeAndReel, Part Number=MLP2520S4R7ST0S1, Part Status=Active, PartId=3467, Price=0.14, Series=MLP, Shielding=Shielded, Size / Dimension="0.098\" L x 0.079\" W (2.50mm x 2.00mm)", Supplier 1=DigiKey, Supplier Device Package="1008 (2520 Metric)", Type=Multilayer
R1 R2 R3 R4 R6 R7 R11 R12 R13: library part RK73H1ETTP1432F, "RES 14.3K OHM 1% 1/10W 0402", Device Package="0402 (1005 Metric)", Manufacturer="KOA Speer Electronics, Inc.", Operating Temperature="-55°C ~ 155°C", Power (Watts)="0.1W, 1/10W", Ratings=AEC-Q200, Resistance="14.3 kOhms", Supplier Device Package=0402, Supplier Part Number 1=2019-RK73H1ETTP1432FCT-ND, Temperature Coefficient=±100ppm/°C, Tolerance=±1%, ComponentLink1Description=Datasheet, ComponentLink1URL=http://www.koaspeer.com/catimages/Products/RK73H/RK73H.pdf, ComponentLink2Description="DigiKey Link", ComponentLink2URL=https://www.digikey.com/en/products/detail/koa-speer-electronics-inc/RK73H1ETTP1432F/9844351, Composition="Thick Film", Features="Automotive AEC-Q200, Moisture Resistant", Height - Seated (Max)="0.016\" (0.40mm)", LastUpdated="8/14/2022 9:23:49 PM", Lifecycle Status=Active, Minimum Order=1, Number of Terminations=2, Package / Case="0402 (1005 Metric)", Packaging=CutTape, Part Number=RK73H1ETTP1432F, Part Status=Active, PartId=10193, Price=0.01, Series=RK73H, Size / Dimension="0.039\" L x 0.020\" W (1.00mm x 0.50mm)", Supplier 1=DigiKey
R16_1 R16_2 R16_3: library part RP73PF1E5K62BTD, "RES 5.62K OHM 0.1% 1/10W 0402", Device Package="0402 (1005 Metric)", Manufacturer="TE Connectivity Passive Product", Operating Temperature="-55°C ~ 155°C", Power (Watts)="0.1W, 1/10W", Resistance="5.62 kOhms", Supplier Device Package=0402, Supplier Part Number 1=A127391CT-ND, Temperature Coefficient=±25ppm/°C, Tolerance=±0.1%, ComponentLink1Description=Datasheet, ComponentLink1URL=https://www.te.com/commerce/DocumentDelivery/DDEController?Action=srchrtrv&DocNm=1773272&DocType=DS&DocLang=English, ComponentLink2Description="DigiKey Link", ComponentLink2URL=https://www.digikey.com/en/products/detail/te-connectivity-passive-product/RP73PF1E5K62BTD/8260933, Composition="Thin Film", Height - Seated (Max)="0.014\" (0.35mm)", LastUpdated="2/9/2024 8:30:24 PM", Lifecycle Status=Active, Minimum Order=1, Number of Terminations=2, Package / Case="0402 (1005 Metric)", Packaging=TapeAndReel, Part Number=RP73PF1E5K62BTD, Part Status=Active, PartId=2425, Price=0.08, Series="RP73, Holsworthy", Size / Dimension="0.039\" L x 0.020\" W (1.00mm x 0.50mm)", Supplier 1=DigiKey
U1: library part PIC32MZ0512EFE064-I/PT, "32-bit Microcontrollers - MCU 32-BIT MCU 512KB FL 128KB RAM, No Crypto", Package="TQFP-64 Microchip", Availability=Unavailable, MF=Microchip, MP=PIC32MZ2048EFG064T-I/PT, Price=None, SnapEDA_Link=https://www.snapeda.com/parts/PIC32MZ2048EFG064T-I/PT/Microchip/view-part/565997/?ref=snap
U2: "802.15.4 Zigbee Transceiver Module 2.4GHz Antenna Not Included, U.FL Surface Mount", Package="SMD-34 Digi International", Availability=Unavailable, MF="Digi International", MP=XB3-24Z8UM-J, Price=None, SnapEDA_Link=https://www.snapeda.com/parts/XB3-24Z8UM-J/Digi%20International/view-part/2762908/?ref=snap
U4: "5V fixed step down Buck"
U5_1 U5_2 U5_3: library part TLV74033PDQNR
U6: "Magnetometer"
UART1 UART2 UART3: "CONN HEADER SMD 3POS 1MM", Current Rating (Amps)=0.7A, Insulation Color=Natural, Manufacturer="JST Sales America Inc.", Material Flammability Rating="UL94 V-0", Operating Temperature="-25°C ~ 85°C", Supplier Part Number 1=455-1789-1-ND, Voltage Rating=50V, ComponentLink1Description=Datasheet, ComponentLink1URL=http://www.jst-mfg.com/product/pdf/eng/eSR.pdf, ComponentLink2Description="DigiKey Link", ComponentLink2URL=http://digikey.com/product-detail/en/jst-sales-america-inc/BM03B-SRSS-TB-LF-SN/455-1789-1-ND/926860, Connector Type=Header, Contact Finish - Mating=Tin, Contact Finish - Post=Tin, Contact Material="Copper Alloy", Contact Shape=Square, Contact Type="Male Pin", Fastening Type=Push-Pull, Features="Solder Retention", Insulation Height="0.167\" (4.25mm)", Insulation Material="Polyamide (PA), Nylon", LastUpdated="1/12/2020 10:12:14 PM", Lifecycle Status=Active, Minimum Order=1, Mounting Type="Surface Mount", Number of Positions=3, Number of Positions Loaded=All, Number of Rows=1, Packaging=TapeAndReel, Part Number=BM03B-SRSS-TB(LF)(SN), Part Status=Active, PartId=14, Pitch - Mating="0.039\" (1.00mm)", Price=0.24, Series=SR, Shrouding="Shrouded - 4 Wall", Style="Board to Cable/Wire", Supplier 1=DigiKey, Termination=Solder

## Free pads (board coordinates)
  round 0 hole 3.1 unplated: 1(-14.4,52.5)

## Via types
v1: diameter 0.45, hole 0.3, Top Layer to Bottom Layer, tented both sides, 77 vias
v2: diameter 0.45, hole 0.3, Top Layer to Bottom Layer, 14 vias
v3: diameter 0.5, hole 0.3, Top Layer to Bottom Layer, tented both sides, 5 vias

## Nets (pads, with @x,y where several pads share a name; then routed paths per layer and width w, separated by ;. In a path a pad name is that pad's centre, name@x,y a point inside that pad or via, vN(x,y) a via of type N, cw(c..) or ccw(c..) an arc to the next point about the centre after c; other vN are vias at no path point)
3V3: C10_3.2 C20.2 C21.2 C22.2 C23.2 C24.2 C27.2 ICSP1.2 R11.1 U1.8 U1.19 U1.26 U1.34 U1.39 U1.54 U1.60 U5_3.1 | length 18.9
  Top Layer w0.127: v1(15.555,-6.955) 16.075,-7.475 R11.1 ; U1.34 18.88,3.765 18.88,4.28 19.1,4.5 v2(20.015,4.5)
  Top Layer w0.254: v1(8.8,5) v1(9.5,5) 9.48,5.02 9.48,5.88 C10_3.2 9.287,6.073 9.287,6.458 U5_3.1 ; v1(9.345,0.725) C27.2@10.085,0.725 ; v1(9.355,-2.655) C23.2@10.095,-2.655 ; C23.2 10.12,-2.64 10.31,-2.45 U1.60 ; C27.2 10.12,0.74 10.31,0.55 U1.54 ; U1.8 15.35,-5.99 15.54,-6.18 C24.2 ; v1(15.555,-6.955) C24.2@15.555,-6.215 ; U1.39 16.35,4.59 16.54,4.78 C22.2 16.52,4.82 16.52,5.58 v1(16.5,5.6) ; U1.19 20.79,-3.45 20.807,-3.467 20.927,-3.467 C20.2 ; U1.26 20.038,0.053 21.013,0.053 C21.2 21.13,0.17 v1(21.87,0.17) ; C20.2@21.115,-3.625 v1(21.855,-3.625)
  Bottom Layer w0.254: ICSP1.2 16.173,6.865 16.173,5.98 16.5,5.653 v1(16.5,5.6)
3V3_IMU: C7.1 C10_1.2 C13.1 C17.1 C18.1 U3.8 U3.13 U5_1.1 U6.5 U6.6 U6.10 | length 34
  Top Layer w0.254: C17.1 -6.867,0.773 -6.867,1.262 -6.85,1.279 U6.5 U6.6 ; U6.10 -5.03,3.05 C18.1@-4.82,2.84 ; U5_1.1 -1.425,6.505 -1.14,6.22 C10_1.2 ; U3.8 2.65,-0.09 2.84,-0.28 C13.1 ; U3.13 5.448,1.498 6.207,1.498 6.207,2.187 6.38,2.36 C7.1
  Top Layer w0.5: C17.1 -6.99,0.55 -6.99,0.093 -6.697,-0.2 -1.14,-0.2 ; C18.1@-4.82,2.84 C18.1 -1.14,2.84 ; C10_1.2 -1.14,2.84 ; C13.1 2.84,-1.1 ; C7.1 6.4,0.1 5.2,-1.1 2.84,-1.1 ; -1.14,2.84 -1.14,-0.16 -0.2,-1.1 2.84,-1.1
3V3_XBee: C6.1 C10_2.2 U2.2 U5_2.1 U7.2 | length 27.3
  Top Layer w0.254: U5_2.1 23.382,13.587 23.767,13.587 C10_2.2 25.454,13.76 ; v2(25.4,14.3) 25.438,14.262 25.438,13.776 25.454,13.76 ; v2(26,14.3) 26,13.76 ; U2.2 29.279,14.36 C6.1 27.78,14.36 27.18,13.76 26,13.76 ; 25.454,13.76 26,13.76
  Layer 2 w0.45: v2(25.4,14.3) v2(26,14.3) 29.3,11 v2(40.7,11) v2(41.4,11)
  Bottom Layer w0.254: v2(40.7,11) v2(41.4,11) 42.825,11 U7.2
5V: C2.2 C3.2 C9_1.2 C9_2.2 C9_3.2 L1.2 R16_1.1 R16_2.1 R16_3.1 U4.1 U5_1.4 U5_2.4 U5_3.4 | length 11.4
  Top Layer w0.254: v1(-3,8.4) R16_1.1 ; C9_1.2 -2.187,7.153 -2.187,7.77 ; v1(-2.2,9.1) -2.187,9.087 -2.187,8.413 R16_1.1 ; U5_1.4 -2.147,7.73 -2.187,7.77 ; v1(7.612,8.113) R16_3.1@8.437,8.113 ; C9_3.2 8.413,6.853 8.413,7.47 ; R16_3.1 8.413,8.087 8.413,7.47 ; R16_3.1@8.425,8.125 v1@8.425,8.8 ; U5_3.4 8.453,7.43 8.413,7.47 ; v1@21.04,12.725 R16_2.1@21.715,12.725 ; v1(21.728,11.912) R16_2.1@21.728,12.737 ; R16_2.1 21.753,12.713 22.37,12.713 ; U5_2.4 22.41,12.753 22.37,12.713 ; C9_2.2 22.987,12.713 22.37,12.713 ; C3.2 C3.2@23.81,-8.73 ; L1.2@24.885,-4.84 L1.2 ; U4.1@25.427,-8.52 25.65,-8.743 U4.1 ; -2.187,7.77 -2.187,8.387 R16_1.1
  other v1: 8.412,8.812 21.028,12.712
  other v3: 23.5,-7.8 23.5,-7.1 23.5,-6.4 23.5,-5.7
5VREG_BST: C1.1 U4.6 | length 1.1
  Top Layer w0.254: C1.1 25.61,-6.56 U4.6
5VREG_SW: C1.2 L1.1 U4.5 | length 5.1
  Top Layer w0.254: C1.2 26.262,-7.44 26.41,-7.291 26.41,-6.79 U4.5
  Top Layer w0.7: U4.5 26.6,-5.675 27.05,-5.225 27.325,-5.225 27.575,-4.975 L1.1
GND: C2.1 C3.1 C4.1 C5.1 C6.2 C7.2 C9_1.1 C9_2.1 C9_3.1 C10_1.1 C10_2.1 C10_3.1 C13.2 C14.2 C15.2 C16.2 C17.2 C18.2 C19.2 C20.1 C21.1 C22.1 C23.1 C24.1 C25.2 C27.1 D1.2 ICSP1.3 J1.5 J1.S1 J1.S2 J1.S3 J1.S4 J1.S5 J1.S6 P1.1 U1.7 U1.20 U1.25 U1.35 U1.40 U1.55 U1.59 U1.65 U2.1 U2.10 U2.12 U2.21 U2.32 U2.34 U3.1 U3.9 U3.11 U3.18 U3.25 U4.4 U5_1.2 U5_1.5 U5_2.2 U5_2.5 U5_3.2 U5_3.5 U6.2 U6.3 U6.9 U6.12 U7.1 U7.15 U7.38 U7.39 UART1.3 UART2.3 UART3.3 | length 49.1
  Top Layer w0.127: v1(-3,6.26) C9_1.1 ; U5_1.5 v1(-0.3,7.3) ; v1(-0.26,5.4) C10_1.1 ; v1(7.6,5.96) C9_3.1 ; U5_3.5 v1(10.3,7) ; v1(10.34,5.1) C10_3.1 ; C25.2 18.04,-7.4 v1(19,-7.4) ; U1.35 18.35,4.035 18.53,4.215 18.53,4.342 18.9,4.712 18.9,4.963 ; U5_2.5 v1(22.84,14.6) ; v1(23.88,11.9) C9_2.1 ; C10_2.1 v1(24.74,14.64)
  Top Layer w0.254: C19.2 C19.2@-8.38,2.14 ; U6.3 -7.596,2.05 -7.686,2.14 C19.2@-8.38,2.14 ; U6.2 -7.99,2.55 -8.207,2.333 -8.207,2.313 C19.2@-8.38,2.14 ; v1(-7.4,-7.6) UART3.3 ; U6.9 -5.604,2.55 -5.483,2.429 -5.368,2.429 -5.225,2.286 -5.146,2.286 -4.82,1.96 C18.2 ; v1(-1.1,-7.6) UART1.3 ; U5_1.5 -1.1,7.195 U5_1.2 -0.433,6.528 -0.433,6.373 C10_1.1 ; U3.1 2.1,3.95 3.35,2.7 v1(3.375,2.7) U3.25 ; U3.9 3.15,2.45 U3.25 ; U3.25@3.45,2.7 4.7,3.95 U3.18 ; U3.11 4.15,1.95 U3.25 ; C14.2 4.84,-0.28 5.462,0.342 5.462,0.462 v2(5.5,0.5) ; v1(5.2,-7.6) UART2.3 ; v1(9.345,-1.775) C23.1@10.085,-1.775 ; v1(9.345,-0.155) C27.1@10.085,-0.155 ; U5_3.5 9.5,6.895 U5_3.2 10.167,6.228 10.167,6.073 C10_3.1 ; C23.1 10.12,-1.76 10.31,-1.95 U1.59 ; C27.1 10.12,-0.14 10.31,0.05 U1.55 ; v1(14.3,0.6) v1(15.6,-0.7) ; C24.1 14.66,-6.18 14.85,-5.99 U1.7 ; v1(14.675,-6.945) C24.1@14.675,-6.205 ; v1(15.68,5.58) 15.68,4.82 C22.1 15.66,4.78 15.85,4.59 U1.40 ; U1.20 20.89,-2.95 21.08,-2.76 C20.1 ; U1.25 20.79,-0.45 21.08,-0.74 C21.1 ; C20.1@21.095,-2.745 v1(21.835,-2.745) ; C21.1@21.115,-0.725 v1(21.855,-0.725) ; U5_2.5 22.945,13.8 U5_2.2 23.612,14.467 23.767,14.467 C10_2.1 ; v3(27.5,-7.6) 27.525,-7.575 27.525,-6.625 U4.4 28.6,-6.6 ; C5.1 28.6,-6.6 ; 28.6,-6.4 28.6,-6.6 ; C4.1 29.75,-6.925 29.425,-6.6 28.6,-6.6
  other v1: 13.2,-3.1 15.6,-3.1 18,-3.1 14.3,-2 16.9,-2 13.2,-0.7 18,-0.7 1,0.1 -5.2,0.6 16.9,0.6 -4.82,1.28 13.2,1.7 15.6,1.7 18,1.7 -9.2,2.2 6.4,4 5.14,5.7
MCLR: C25.1 ICSP1.1 R11.2 U1.9 | length 22.7
  Top Layer w0.127: U1.9 15.916,-5.202 15.916,-5.575 16.138,-5.797 16.138,-6.138 v1(16.2,-6.2) 16.875,-6.2 R11.2 17.765,-6.325 C25.1
  Layer 1 w0.127: v1(16.2,-6.2) 16.22,-6.2 16.52,-6.5 19.8,-6.5 20.6,-5.7 20.6,0.852 16.885,4.568 16.885,5.184 v1(17.4,5.7)
  Bottom Layer w0.127: ICSP1.1 17.236,6.801 17.236,5.951 17.4,5.787 v1(17.4,5.7)
NetC14_1: C14.1 U3.10 | length 1.2
  Top Layer w0.254: U3.10 3.65,0.03 3.96,-0.28 C14.1
NetC15_1: C15.1 U3.20 | length 1.1
  Top Layer w0.254: U3.20 4.15,5.59 C15.1
NetC19_1: C19.1 U6.4 | length 1.1
  Top Layer w0.254: C19.1 -7.79,1.26 -7.598,1.452 -7.598,1.548 -7.596,1.55 U6.4
NetD1_1: D1.1
NetR16_1_2: R16_1.2 U5_1.3 | length 0.8
  Top Layer w0.127: R16_1.2 -0.95,8.4 -0.777,8.227 -0.777,7.732 U5_1.3
NetR16_2_2: R16_2.2 U5_2.3 | length 0.8
  Top Layer w0.127: R16_2.2 21.74,13.95 21.913,14.123 22.408,14.123 U5_2.3
NetR16_3_2: R16_3.2 U5_3.3 | length 0.8
  Top Layer w0.127: R16_3.2 9.65,8.1 9.823,7.927 9.823,7.432 U5_3.3
PGC: ICSP1.5 U1.15 | length 17.5
  Top Layer w0.127: U1.15 18.875,-5.16 18.875,-5.975 v1(18.9,-6)
  Layer 1 w0.127: v1(13,5.8) 14.7,5.8 15.011,5.49 15.011,5.303 15.403,4.91 15.59,4.91 18.9,1.6 v1(18.9,-6)
  Bottom Layer w0.127: v1(13,5.8) ICSP1.5
PGD: ICSP1.4 U1.16 | length 21.1
  Top Layer w0.127: U1.16 19.35,-5.75 v1(19.6,-6)
  Layer 1 w0.127: v1(12.4,5.8) 12.9,6.3 14.7,6.3 15.265,5.736 15.265,5.408 15.508,5.164 15.836,5.164 19.6,1.4 v1(19.6,-6)
  Bottom Layer w0.127: v1(12.4,5.8) 12.816,5.385 13.384,5.385 14,6 ICSP1.4
RSSI: U2.7
RX1: R12.1 U1.18 | length 20.5
  Top Layer w0.127: U1.18 20.101,-4.017 20.531,-4.017 20.753,-4.238 21.038,-4.238 v1(21.1,-4.3)
  Bottom Layer w0.127: R12.1 6,-5.6 6.8,-4.8 19.562,-4.8 19.579,-4.782 19.618,-4.782 20.1,-4.3 v1(21.1,-4.3)
RX1_R: R12.2 UART1.1 | length 3.9
  Top Layer w0.254: v1(0.9,-7.6) UART1.1
  Bottom Layer w0.127: v1(0.9,-7.6) 0.5,-7.2 0.5,-6.25 1.15,-5.6 R12.2
RX2: R1.1 U1.5 | length 6.2
  Top Layer w0.127: v1(13.4,-6.3) 13.462,-6.238 13.462,-6.138 13.85,-5.749 U1.5
  Bottom Layer w0.127: R1.1 13,-6.7 v1(13.4,-6.3)
RX2_R: R1.2 UART2.1 | length 2.4
  Top Layer w0.254: v1(7.2,-7.6) UART2.1
  Bottom Layer w0.127: v1(7.2,-7.6) 7.525,-7.275 R1.2
RX3: R3.1 U1.29 | length 30.6
  Top Layer w0.127: U1.29 20.06,1.525 v1(20.975,1.525)
  Bottom Layer w0.127: R3.1 -0.3,-5.7 1.2,-4.2 18.3,-4.2 20.975,-1.525 v1(20.975,1.525)
RX3_R: R3.2 UART3.1 | length 3.8
  Top Layer w0.254: v1(-5.4,-7.6) UART3.1
  Bottom Layer w0.127: v1(-5.4,-7.6) -5.8,-7.2 -5.8,-6.35 -5.15,-5.7 R3.2
SCL: U1.42 U3.23 U6.1 | length 29.7
  Top Layer w0.127: v1(-8.3,3.2) -8.213,3.2 -8.063,3.05 U6.1 ; v1(2.6,5.5) 2.625,5.475 2.625,4.7 U3.23 ; v1(14.3,4.517) 14.326,4.491 14.709,4.491 14.783,4.416 14.783,3.801 U1.42
  Layer 1 w0.127: v1(-8.3,3.2) 0.7,3.2 0.9,3.4 ; v1(2.6,5.5) 1.22,5.5 0.9,5.18 0.9,3.4 ; v1(14.3,4.517) 13.183,3.4 0.9,3.4
SDA: U1.41 U3.24 U6.11 | length 27.6
  Top Layer w0.127: U6.11 -6.35,3.325 -6.162,3.513 -6.162,3.738 v1(-6.1,3.8) ; v1(1.5,5) 1.504,4.996 2.039,4.996 2.15,4.885 U3.24 ; v1(14.521,5.05) 14.562,5.05 15.17,4.443 15.17,4.401 15.284,4.287 15.284,3.801 U1.41
  Layer 1 w0.127: v1(-6.1,3.8) -2.678,3.8 -0.562,5.915 2.772,5.915 3.016,5.672 3.016,5 ; v1(1.5,5) 3.016,5 ; v1(14.521,5.05) 13.75,5.05 13.044,4.344 8.055,4.344 7.4,5 3.016,5
TX1: R13.1 U1.17 | length 19
  Top Layer w0.127: U1.17 20.1,-4.515 v1(20.1,-5)
  Bottom Layer w0.127: R13.1 5.5,-6.6 7,-5.1 19.621,-5.1 19.684,-5.036 20.064,-5.036 v1(20.1,-5)
TX1_R: R13.2 UART1.2 | length 4.5
  Top Layer w0.254: v1(-0.1,-7.6) UART1.2
  Bottom Layer w0.127: v1(-0.1,-7.6) 0.4,-8.1 1.1,-8.1 1.4,-7.8 1.4,-6.775 R13.2
TX2: R2.1 U1.6 | length 6.9
  Top Layer w0.127: v1(14,-6.3) 14.062,-6.238 14.062,-5.897 14.283,-5.675 14.283,-5.202 U1.6
  Bottom Layer w0.127: R2.1 13.4,-5.7 v1(14,-6.3)
TX2_R: R2.2 UART2.2 | length 3.9
  Top Layer w0.254: v1(6.2,-7.6) UART2.2
  Bottom Layer w0.127: v1(6.2,-7.6) 6.2,-6.95 7.45,-5.7 R2.2
TX3: R4.1 U1.21 | length 28.1
  Top Layer w0.127: U1.21 20.101,-2.384 20.475,-2.384 20.697,-2.162 21.038,-2.162 v1(21.1,-2.1)
  Bottom Layer w0.127: R4.1 -0.819,-6.7 1.381,-4.5 18.7,-4.5 v1(21.1,-2.1)
TX3_R: R4.2 UART3.2 | length 4.4
  Top Layer w0.254: v1(-6.4,-7.6) UART3.2
  Bottom Layer w0.127: v1(-6.4,-7.6) -5.9,-8.1 -5.2,-8.1 -4.9,-7.8 -4.9,-6.875 R4.2
USB_D+: J1.3 U1.37 | length 12.8
  Top Layer w0.127: U1.37 17.35,4.045 17.407,4.102 17.407,4.356 17.838,4.787 17.838,5.138 v2(17.9,5.2)
  Layer 1 w0.127: v2(15.5,14) 17.9,11.6 v2(17.9,5.2)
  Bottom Layer w0.127: v2(15.5,14) J1.3
USB_D-: J1.2 U1.36 | length 15.4
  Top Layer w0.127: U1.36 17.85,4.35 18.412,4.912 18.412,5.261 v2(18.731,5.58)
  Layer 1 w0.127: v2(14.85,14) 15.265,14.416 16.322,14.416 19.1,11.638 19.1,6.1 18.793,5.793 18.793,5.641 v2(18.731,5.58)
  Bottom Layer w0.127: J1.2@14.8,15.25 J1.2 v2(14.85,14)
USB_ID: J1.4 U1.38 | length 13.8
  Top Layer w0.127: U1.38 16.916,3.801 16.916,4.287 17.238,4.609 17.238,4.838 v2(17.3,4.9)
  Layer 1 w0.127: v2(16.15,14) 18.316,11.835 18.316,4.916 18.1,4.7 17.587,4.7 17.387,4.9 v2(17.3,4.9)
  Bottom Layer w0.127: v2(16.15,14) J1.4
VBAT: C4.2 C5.2 C16.1 P1.2 U4.2 U4.3 | length 16.1
  Top Layer w0.7: U4.2 U4.3 28.03,-8.8 28.461,-8.369 29.706,-8.369 C4.2 29.825,-8.3 31.2,-8.3 31.6,-7.9 P1.2
  Top Layer w0.712: P1.2 34.2,-8.6 34.7,-9.1 40.425,-9.1 C16.1
VBUS: J1.1 U1.33 | length 17.4
  Top Layer w0.127: U1.33 19.415,3.8 v2(20,3.8)
  Layer 1 w0.127: v2(14.2,14) 14.87,14.67 16.831,14.67 20.431,11.069 20.431,4.231 v2(20,3.8)
  Bottom Layer w0.127: v2(14.2,14) J1.1
XBEE_DIN: R6.2 U2.4 | length 2.1
  Top Layer w0.127: R6.2 29.447,11.9 U2.4
XBEE_DIN_R: R6.1 U1.45 | length 17.6
  Top Layer w0.127: U1.45 13.35,5.15 16.353,8.153 23.169,8.153 26.425,11.409 R6.1
XBEE_DOUT: R7.2 U2.3 | length 1.9
  Top Layer w0.127: R7.2 29.447,12.9 U2.3
XBEE_DOUT_R: R7.1 U1.44 | length 19
  Top Layer w0.127: U1.44 13.85,5.038 16.512,7.7 23.6,7.7 26.99,11.091 26.99,12.41 26.5,12.9 R7.1
pads on no net: ICSP1.M U1.1 U1.2 U1.3 U1.4 U1.10 U1.11 U1.12 U1.13 U1.14 U1.22 U1.23 U1.24 U1.27 U1.28 U1.30 U1.31 U1.32 U1.43 U1.46 U1.47 U1.48 U1.49 U1.50 U1.51 U1.52 U1.53 U1.56 U1.57 U1.58 U1.61 U1.62 U1.63 U1.64 U2.5 U2.6 U2.8 U2.9 U2.11 U2.13 U2.14 U2.15 U2.16 U2.17 U2.18 U2.19 U2.20 U2.22 U2.23 U2.24 U2.25 U2.26 U2.27 U2.28 U2.29 U2.30 U2.31 U2.33 U3.2 U3.3 U3.4 U3.5 U3.6 U3.7 U3.12 U3.14 U3.15 U3.16 U3.17 U3.19 U3.21 U3.22 U6.7 U6.8 U7.3 U7.4 U7.5 U7.6 U7.7 U7.8 U7.9 U7.10 U7.11 U7.12 U7.13 U7.14 U7.16 U7.17 U7.18 U7.19 U7.20 U7.21 U7.22 U7.23 U7.24 U7.25 U7.26 U7.27 U7.28 U7.29 U7.30 U7.31 U7.32 U7.33 U7.34 U7.35 U7.36 U7.37 UART1.M UART2.M UART3.M

## Polygon pours and split planes (outlines as drawn)
GND on Bottom Layer "GND_BOT" (solid, pour order 2): -10,45 22.4,45 45,45 45,-10 -10,-10 -10,30.8
5V on Top Layer "PolygonDirect" (solid, pour order 0): 25.9,-3.5 24.2,-3.5 23.1,-4.6 23.1,-8.9 23.6,-9.4 26,-9.4 26,-8.3 25.7,-8 25.4,-8 25.1,-7.7 25.1,-6.1 25.5,-5.7 25.8,-5.7 25.9,-5.6 25.9,-3.4
GND on Top Layer "GND_TOP" (solid, pour order 5): -10,45 22.4,45 45,45 45,-10 -10,-10 -10,30.8
5V on Layer 2 "5V_L03_P004" (solid, pour order 4): -10,-10 -10,20.2 45,20.2 45,-10
3V3 on Layer 2 "3V3_L03_P003" (solid, pour order 3): 8.4,5.1 9.5,6.2 19.5,6.2 22.6,3.1 22.6,-4 19.1,-7.5 12.7,-7.5 8.4,-3.2
GND on Layer 1 "GND_L02_P006" (solid, pour order 6): -10,-10 -10,20.2 45,20.2 45,-10

## Silkscreen, mask and mechanical layers (free items; w line width, h text height)
Top Overlay:
  circle w0.875: c-12.1,51.5 r2
  circle w0.4: c6.2,-3.4 r0.17
  circle w0.3: c6.2,-3.4 r1.6
  lines w0.3: -8.31,-3.1 -5.01,-3.1 ; -0.1,-4.95 -0.1,-1.65 ; -6.639,-1.613 ccw(c-3.96,-3.05) -6.611,-4.538 ccw(c-9.21,-3.1) -6.639,-1.613 ; -1.538,-3.348 cw(c-0.05,-6) 1.387,-3.321 cw(c-0.1,-0.75) -1.538,-3.348
  text "+" at 39.354,1.8 h1.52
  text "-" at 37.054,1.592 h1.52
Bottom Overlay:
  circle w0.875: c-16.3,52 r2
Board:
  the board outline again, w0.1